# Altium PCB AVR USB Downloader V2.PcbDoc
Units mm, origin at the board's own origin, x right, y up, seen from the top; angles counter-clockwise.
Board outline 55 x 25 mm, 2 copper layers (Top Layer, Bottom Layer), stack 1.544 mm thick; 17 components, 17 nets, 70 pads, 8 vias.
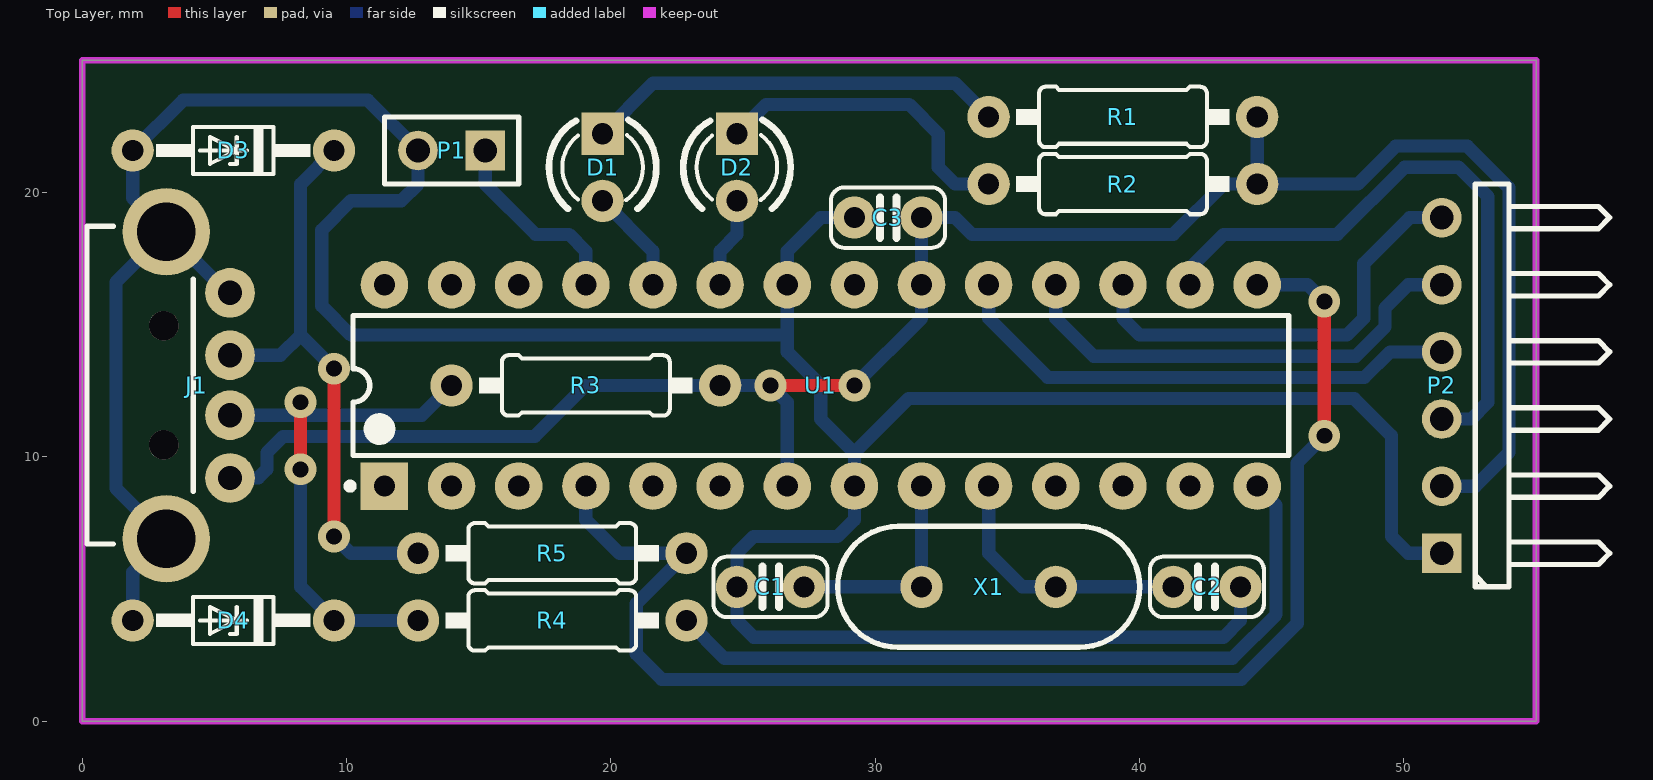
[diagram p0: Top Layer view]
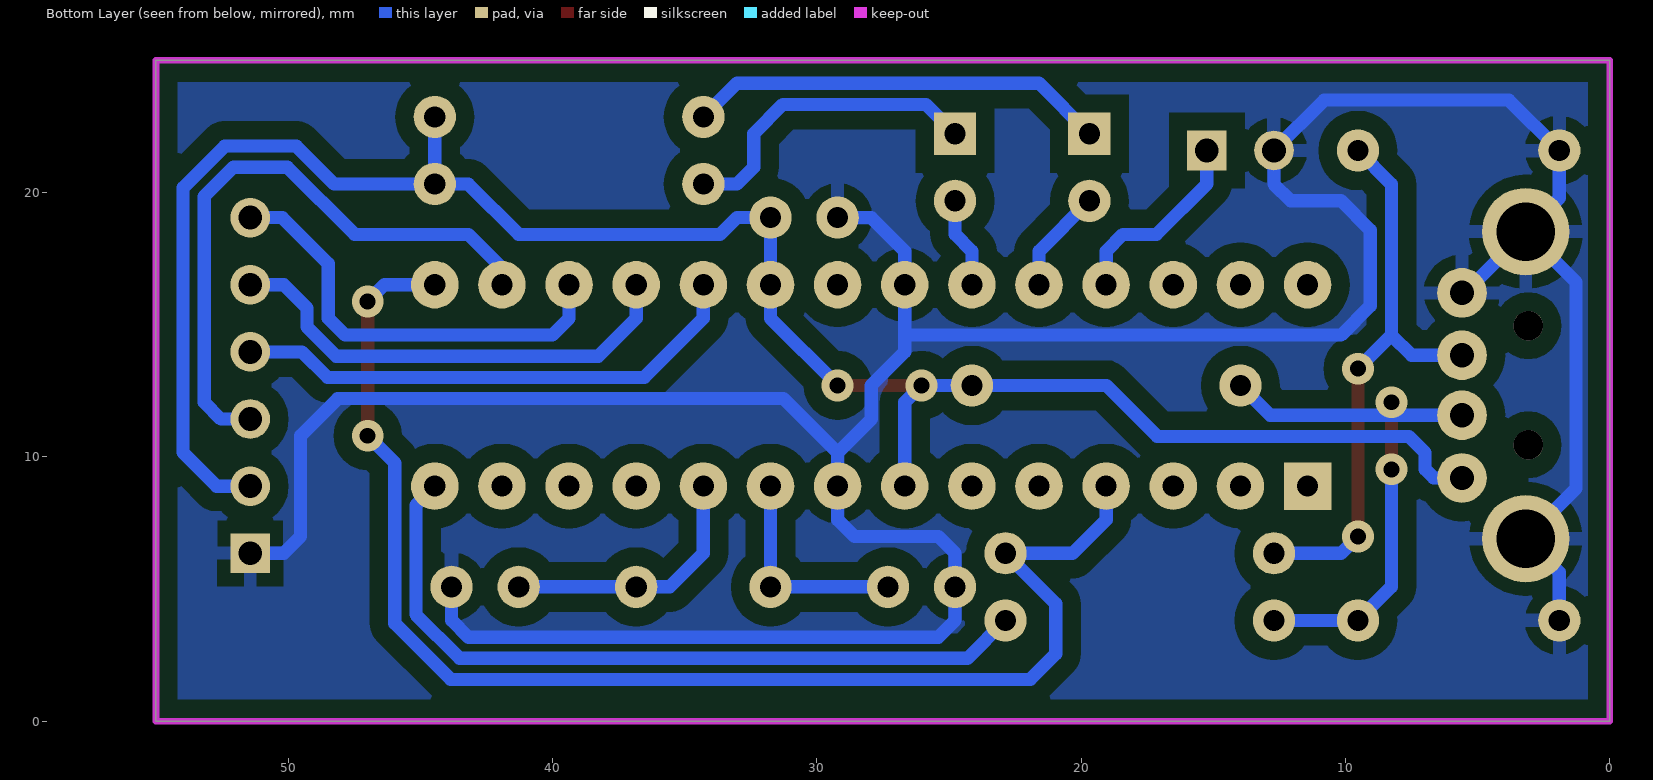
[diagram p1: Bottom Layer view, seen from below]

## Layer stack, top to bottom
Top Solder: solder mask 0.0102, Solder Resist, Dk 3.5
Top Layer: signal copper 0.0356
Dielectric 1: dielectric 1.4732, FR-4, Dk 4.8
Bottom Layer: signal copper 0.0356
Bottom Solder: solder mask 0.0102, Solder Resist, Dk 3.5

## Board outline
0,0 55,0 55,25 0,25

## Design rules (kind name [scope] priority, off if disabled: settings)
Clearance Clearance_1 [InNamedPolygon('Bottom Polygon')] p1: gap=0.7
Clearance [All] p2: gap=0.3
ComponentClearance [All] p1: gap=0 collisioncheckmode=3 verticalgap=0 showdistances=FALSE
PolygonConnect PolygonConnect_1 [All vs IsNamedPolygon('Bottom Polygon')] p1: connectstyle=Relief reliefconductorwidth=0.5 reliefentries=4 polygonreliefangle="90 Angle" airgapwidth=0.5
PolygonConnect [All] p2: connectstyle=Relief reliefconductorwidth=0.254 reliefentries=4 polygonreliefangle="90 Angle" airgapwidth=0.254
RoomDefinition "AVR USB Downloader V2" [InComponentClass('AVR USB Downloader V2')] p1: confinementstyle=ConfineIn formatcopy=TRUE lockcomponents=FALSE outline -16.51,0 61.595,0 61.595,27.94 -16.51,27.94
RoutingVias [All] p1: holewidth=0.6 width=1.2 viastyle="Through Hole" minholewidth=0.6 minwidth=1.2 maxholewidth=0.6 maxwidth=1.2
SolderMaskExpansion [All] p1: expansion=0.102
Width [All] p1: maxlimit=0.5 minlimit=0.5 preferedwidth=0.5
28 further rules are at their usual default settings.

## Components (designator, comment, footprint, x,y, rotation, side; value= is the part's Value field where it differs from the comment)
C1 "22pF" C025-024X044 26.035,5.08 r0 top
C2 "22pF" C025-024X044 42.545,5.08 r180 top
C3 "100nF" C025-024X044 30.48,19.05 r0 top
D1 "LED" LED3MM 19.685,20.955 r270 top
D2 "LED" LED3MM 24.765,20.955 r270 top
D3 "3V6" DO34Z7 5.715,21.59 r180 top
D4 "3V6" DO34Z7 5.715,3.81 r180 top
J1 "Type B" USB-A-H 3.175,12.7 r0 top
P1 "SLOW SCK" HDR1X2 15.24,21.59 r180 top
P2 "ISP" HDR1X6H 51.435,6.35 r90 top
R1 "220" 0207/10 39.37,22.86 r0 top
R2 "220" 0207/10 39.37,20.32 r0 top
R3 "2K2" 0207/10 19.05,12.7 r0 top
R4 "68" 0207/10 17.78,3.81 r180 top
R5 "68" 0207/10 17.78,6.35 r180 top
U1 "ATmega8A-PU" 28P3 27.94,12.7 r90 top
X1 "16MHz" HC49US 34.29,5.08 r180 top

## Footprints (in the part's own frame and the unit in brackets; to place one, negate y for a bottom-side part, rotate by r counter-clockwise, add the part's x,y. Pads: shape width x height; smd on the part's side, far side on the other; paste and mask are expansions set on the pad)
28P3 [mm] "DIP, 28-Leads, Row Spacing 7.62mm, Pitch 2.54mm, Body 34.67x7.3mm"
  rect 1.8x1.8 hole 0.8: 1(-3.81,16.51)
  round 1.8 hole 0.8: 2(-3.81,13.97) 3(-3.81,11.43) 4(-3.81,8.89) 5(-3.81,6.35) 6(-3.81,3.81) 7(-3.81,1.27) 8(-3.81,-1.27) 9(-3.81,-3.81) 10(-3.81,-6.35) 11(-3.81,-8.89) 12(-3.81,-11.43) 13(-3.81,-13.97) 14(-3.81,-16.51) 15(3.81,-16.51) 16(3.81,-13.97) 17(3.81,-11.43) 18(3.81,-8.89) 19(3.81,-6.35) 20(3.81,-3.81) 21(3.81,-1.27) 22(3.81,1.27) 23(3.81,3.81) 24(3.81,6.35) 25(3.81,8.89) 26(3.81,11.43) 27(3.81,13.97) 28(3.81,16.51)
  silkscreen extent -3.93,-17.7 2.65,17.93, body extent -3.6,-17.65 3.6,17.65, height 4.58
0207/10 [mm]
  round 1.6 hole 0.8: 1(-5.08,0) 2(5.08,0)
  silkscreen extent -4.04,-1.14 4.04,1.14
C025-024X044 [mm]
  round 1.6 hole 0.8: 1(-1.27,0) 2(1.27,0)
  silkscreen extent -2.16,-1.14 2.16,1.14
DO34Z7 [mm]
  round 1.6 hole 0.8: 1(3.81,0) 2(-3.81,0)
  silkscreen extent -2.92,-0.89 2.92,0.89
HC49US [mm]
  round 1.6 hole 0.8: 1(-2.54,0) 2(2.54,0)
  silkscreen extent -5.71,-2.29 5.71,2.29
HDR1X2 [mm] "Connector; Header; 2 Position"
  rect 1.5x1.5 hole 0.9: 1(0,0)
  round 1.5 hole 0.9: 2(2.54,0)
  silkscreen extent -1.27,-1.27 3.81,1.27
HDR1X6H [mm] "Connector; Header; 6 Position; Right Angle"
  rect 1.5x1.5 hole 0.9: 1(0,0)
  round 1.5 hole 0.9: 2(2.54,0) 3(5.08,0) 4(7.62,0) 5(10.16,0) 6(12.7,0)
  silkscreen extent -1.27,-6.35 13.97,-1.27
LED3MM [mm]
  rect 1.6x1.6 hole 0.8: 1(-1.27,0)
  round 1.6 hole 0.8: 2(1.27,0)
  silkscreen extent -1.79,-2.03 1.57,2.03
USB-A-H [mil]
  round 74 hole 36: 1(95,-137.8) 2(95,-44.37) 3(95,45) 4(95,138)
  round 130.5 hole 87: 5(0,-228.35) 6(0,229)
  round 44 hole 44: ""(-3.94,-88.58) ""(-3.94,89)
  silkscreen extent -118,-236 40,237

## Part data
C1 C2 C3: library part Capacitor
D3 D4: library part Zener
J1: library part USB
P1: library part "Header 2", "Header, 2-Pin"
P2: library part "Header 6H", "Header, 6-Pin, Right Angle"
R1 R2 R3 R4 R5: library part Resistor
U1: "8-bit AVR Microcontroller, 8KB Flash, 512 Bytes EEPROM, 1KB SRAM, 28-pin PDIP, Industrial Grade (-40°C to 85°C)"
X1: library part Crystal

## Via types
v1: diameter 1.2, hole 0.6, Top Layer to Bottom Layer, 8 vias

## Nets (pads, with @x,y where several pads share a name; then routed paths per layer and width w, separated by ;. In a path a pad name is that pad's centre, name@x,y a point inside that pad or via, vN(x,y) a via of type N, cw(c..) or ccw(c..) an arc to the next point about the centre after c; other vN are vias at no path point)
GND: C1.1 C2.1 C3.1 D3.1 D4.1 J1.4 J1.5 J1.6 P1.2 P2.1 U1.8 U1.22 | length 133.1
  Bottom Layer w0.5: D4.1 1.905,5.63 J1.5 1.27,8.805 1.27,16.612 J1.6 ; J1.4 5.486,16.205 J1.6 ; C3.1 27.94,19.05 26.67,17.78 U1.22 26.67,14.605 ; C2.1 43.815,3.81 43.18,3.175 25.4,3.175 24.765,3.81 C1.1 24.765,6.35 25.4,6.985 28.575,6.985 29.21,7.62 U1.8 29.21,10.16 ; P2.1 50.165,6.35 49.53,6.985 49.53,10.795 48.12,12.205 31.255,12.205 29.21,10.16 ; J1.6 1.905,19.787 D3.1 3.81,23.495 10.795,23.495 P1.2 12.7,20.32 12.065,19.685 10.16,19.685 9.055,18.58 9.055,15.71 10.16,14.605 26.67,14.605 ; 26.67,14.605 26.67,13.97 27.94,12.7 27.94,11.43 29.21,10.16
MISO: P2.5 U1.18 | length 18
  Bottom Layer w0.5: U1.18 36.83,15.24 38.265,13.805 48.178,13.805 49.282,14.909 49.282,15.627 50.165,16.51 P2.5
MOSI: P2.6 U1.17 | length 16.7
  Bottom Layer w0.5: U1.17 39.37,15.24 40.005,14.605 47.847,14.605 48.482,15.24 48.482,17.31 50.222,19.05 P2.6
NetC1_2: C1.2 U1.9 X1.2 | length 8.3
  Bottom Layer w0.5: C1.2 X1.2 U1.9
NetC2_2: C2.2 U1.10 X1.1 | length 10.1
  Bottom Layer w0.5: U1.10 34.29,6.35 35.56,5.08 X1.1 C2.2
NetD1_1: D1.1 R1.1 | length 15.9
  Bottom Layer w0.5: D1.1 21.59,24.13 33.02,24.13 R1.1
NetD1_2: D1.2 U1.24 | length 4
  Bottom Layer w0.5: D1.2 21.59,17.78 U1.24
NetD2_1: D2.1 R2.1 | length 12
  Bottom Layer w0.5: D2.1 25.87,23.33 31.28,23.33 32.385,22.225 32.385,20.955 33.02,20.32 R2.1
NetD2_2: D2.2 U1.23 | length 3.4
  Bottom Layer w0.5: U1.23 24.13,17.78 24.765,18.415 D2.2
NetD3_2: D3.2 J1.3 R5.2 | length 22.1
  Top Layer w0.5: v1(9.525,6.985) v1(9.525,13.335)
  Bottom Layer w0.5: J1.3 7.493,13.843 8.255,14.605 ; v1(9.525,6.985) 10.16,6.35 R5.2 ; v1(9.525,13.335) 8.255,14.605 ; D3.2 8.255,20.32 8.255,14.605
NetD4_2: D4.2 J1.2 R3.1 R4.2 | length 21.3
  Top Layer w0.5: v1(8.255,9.525) v1(8.255,12.065)
  Bottom Layer w0.5: J1.2 v1@8.255,11.573 ; v1(8.255,9.525) 8.255,5.08 D4.2 R4.2 ; v1(8.255,12.065) v1@8.255,11.573 ; R3.1 12.843,11.573 v1@8.255,11.573
NetP1_1: P1.1 U1.25 | length 7.4
  Bottom Layer w0.5: P1.1 15.24,20.32 17.145,18.415 18.415,18.415 19.05,17.78 U1.25
NetR4_1: R4.1 U1.14 | length 28.7
  Bottom Layer w0.5: R4.1 24.295,2.375 43.511,2.375 45.165,4.029 45.165,8.175 U1.14
NetR5_1: R5.1 U1.4 U1.15 | length 51.9
  Top Layer w0.5: v1(46.99,10.795) v1(46.99,15.875)
  Bottom Layer w0.5: U1.4 19.05,7.62 20.32,6.35 R5.1 20.955,4.445 20.955,2.54 21.92,1.575 43.843,1.575 45.965,3.697 45.965,9.77 v1(46.99,10.795) ; U1.15 46.355,16.51 v1(46.99,15.875)
RST: P2.3 U1.16 | length 23.7
  Bottom Layer w0.5: U1.16 41.91,17.145 43.18,18.415 47.486,18.415 50.026,20.955 52.07,20.955 53.175,19.85 53.175,12.065 52.54,11.43 P2.3
SCK: P2.4 U1.19 | length 19.7
  Bottom Layer w0.5: U1.19 34.29,15.24 36.525,13.005 48.51,13.005 49.475,13.97 P2.4
VCC: C3.2 J1.1 P2.2 R1.2 R2.2 R3.2 U1.7 U1.20 | length 77.1
  Top Layer w0.5: v1(26.035,12.7) v1(29.21,12.7)
  Bottom Layer w0.5: J1.1 6.66,9.2 6.985,9.525 6.985,10.16 7.598,10.773 17.123,10.773 19.05,12.7 R3.2 v1(26.035,12.7) 26.67,12.065 U1.7 ; v1(29.21,12.7) 31.75,15.24 U1.20 C3.2 33.02,19.05 33.655,18.415 41.275,18.415 43.18,20.32 R2.2 ; R1.2 R2.2 ; P2.2 52.705,8.89 53.975,10.16 53.975,20.181 52.401,21.755 49.695,21.755 48.26,20.32 R2.2
pads on no net: J1. U1.1 U1.2 U1.3 U1.5 U1.6 U1.11 U1.12 U1.13 U1.21 U1.26 U1.27 U1.28

## Polygon pours and split planes (outlines as drawn)
GND on Bottom Layer "Bottom Polygon" (solid, pour order 4): 0,0 55,0 55,25 0,25 0,0

## Keep-outs
Keep-Out Layer:
  the board outline again, w0.254

## Text inside footprints (layer, text, board x,y; h text height)
J1: Mechanical 16 "PCB Edge" at -0.725,8.3 h1.97 r90